# Altium PCB RacerPCB.PcbDoc (part 2 of 2)
Units mm, origin at the board's own origin, x right, y up, seen from the top; angles counter-clockwise.
Board outline 64 x 85 mm, 4 copper layers (Top Side, Ground Plane, Power Plane, Bottom Side), stack 0.844 mm thick; 111 components, 67 nets, 320 pads, 84 vias.
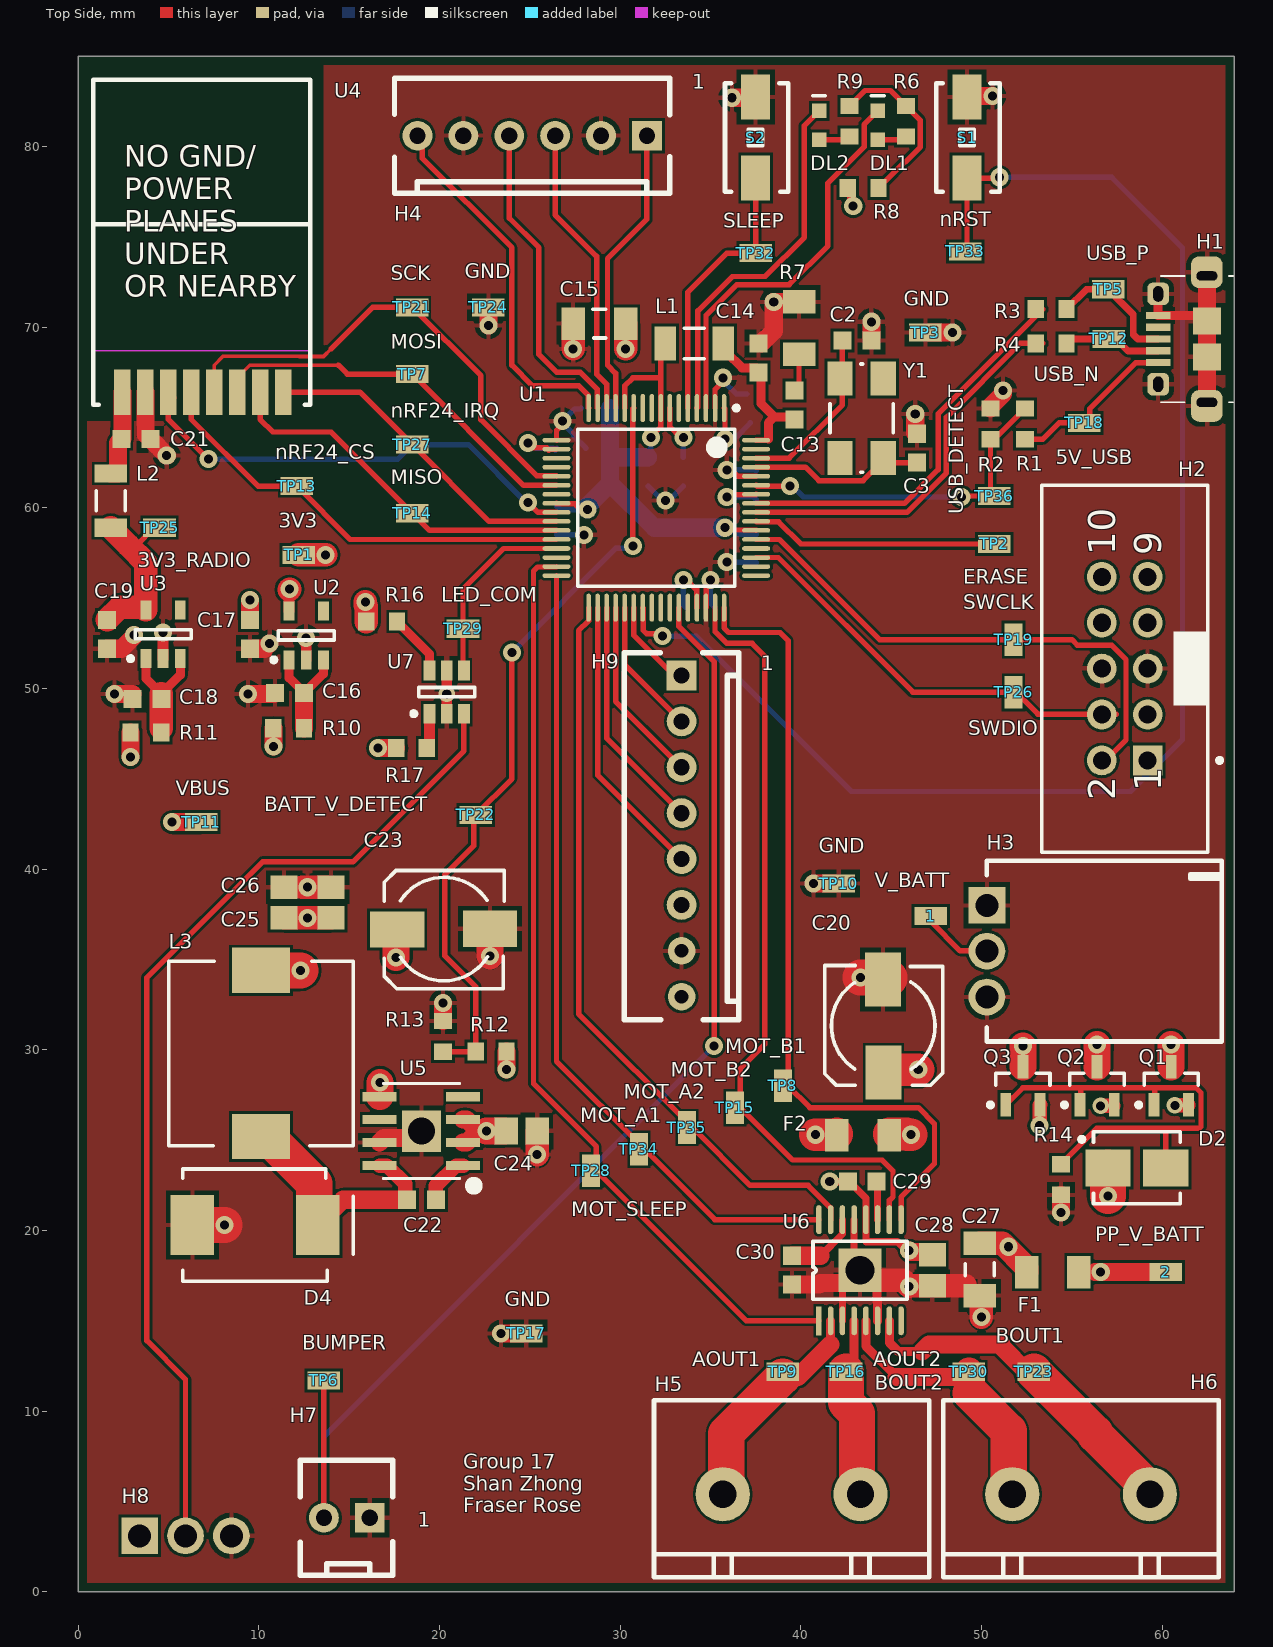
[diagram p0: Top Side view]

## Polygon pours and split planes (outlines as drawn) (continued)
GND on Ground Plane (split plane): 13.471,66.554 11.846,64.929 0.754,64.929 0.51,65.173 0.51,84.49 13.471,84.49
GND on Ground Plane (split plane): 63.49,0.51 0.51,0.51 0.51,64.806 0.608,64.708 0.65,64.68 0.7,64.671 11.9,64.671 11.95,64.68 11.992,64.708 13.692,66.408 13.72,66.45 13.729,66.5 13.729,84.49 63.49,84.49

## Other copper
Top Side:
  pour cut-out: 13.7,85 13.6,84.9 13.6,66.5 11.9,64.8 0,64.8 0,85
Bottom Side:
  pour cut-out: 13.6,85 13.6,66.5 11.9,64.8 0,64.8 0,85
Ground Plane (plane layer: these items are gaps in the copper):
  lines w0.254: 0,65.5 0.7,64.8 11.9,64.8 13.6,66.5 13.6,85
Power Plane (plane layer: these items are gaps in the copper):
  lines w0.254: 0,53 14.3,53 17.3,50 22.1,50 29.2,42.9 29.2,39.3 31.6,36.9 34.9,36.9 38,33.8 38,31.2 ; 7.5,53 7.5,57.5 16.9,66.9 16.9,85 ; 31.7,0 31.7,14.3 41.3,23.9 45,23.9 49.6,23.9 54,19.5 54,16.1 55.8,14.3 ; 31.7,14.2 31.116,14.2 27.5,14.2 18.2,23.5 18.2,27.2 22.2,31.2 23.1,31.2 40.9,31.2 ; 36.2,31.2 48,31.2 ; 43.4,24.029 43.4,31.2 ; 55.929,14.3 64,14.3 ; 48,31.2 51.1,28.1 64,28.1 64,40.8 46.1,40.8 45.5,40.2 45.5,37.1 48,34.6 48,31.2

## Silkscreen, mask and mechanical layers (free items; w line width, h text height)
Top Overlay:
  text "Group 17 / Shan Zhong / Fraser Rose" at 21.3,4.4 h0.8
Board Outline:
  lines w0.254: 0,85 0,0 64,0 64,85 ; 0,85.1 64,85.1

## Dimensions
0,86 to 64,86 on Mechanical 1
65,85 to 65,0 on Mechanical 1

## Text inside footprints (layer, text, board x,y; h text height)
H1: Mechanical 1 "PCB Edge" at 64.749,67.191 h0.52 r90
H2: Top Overlay "9" at 59.95,57.381 h1.5 r90; Top Overlay "10" at 57.41,57.381 h1.5 r90; Top Overlay "1" at 59.95,44.321 h1.5 r90; Top Overlay "2" at 57.41,43.822 h1.5 r90
H4: Top Overlay "1" at 34,83.2 h0.8
H7: Top Overlay "1" at 18.8,3.6 h0.8
H9: Top Overlay "1" at 37.8,51 h0.8
U4: Top Overlay "NO GND/ / POWER / PLANES / UNDER / OR NEARBY" at 2.543,71.675 h1.2
U5: Mechanical 13 "*" at 20.93,24.344 h1.27 r180